# EAGLE board Thermostat (EAGLE 6.3)
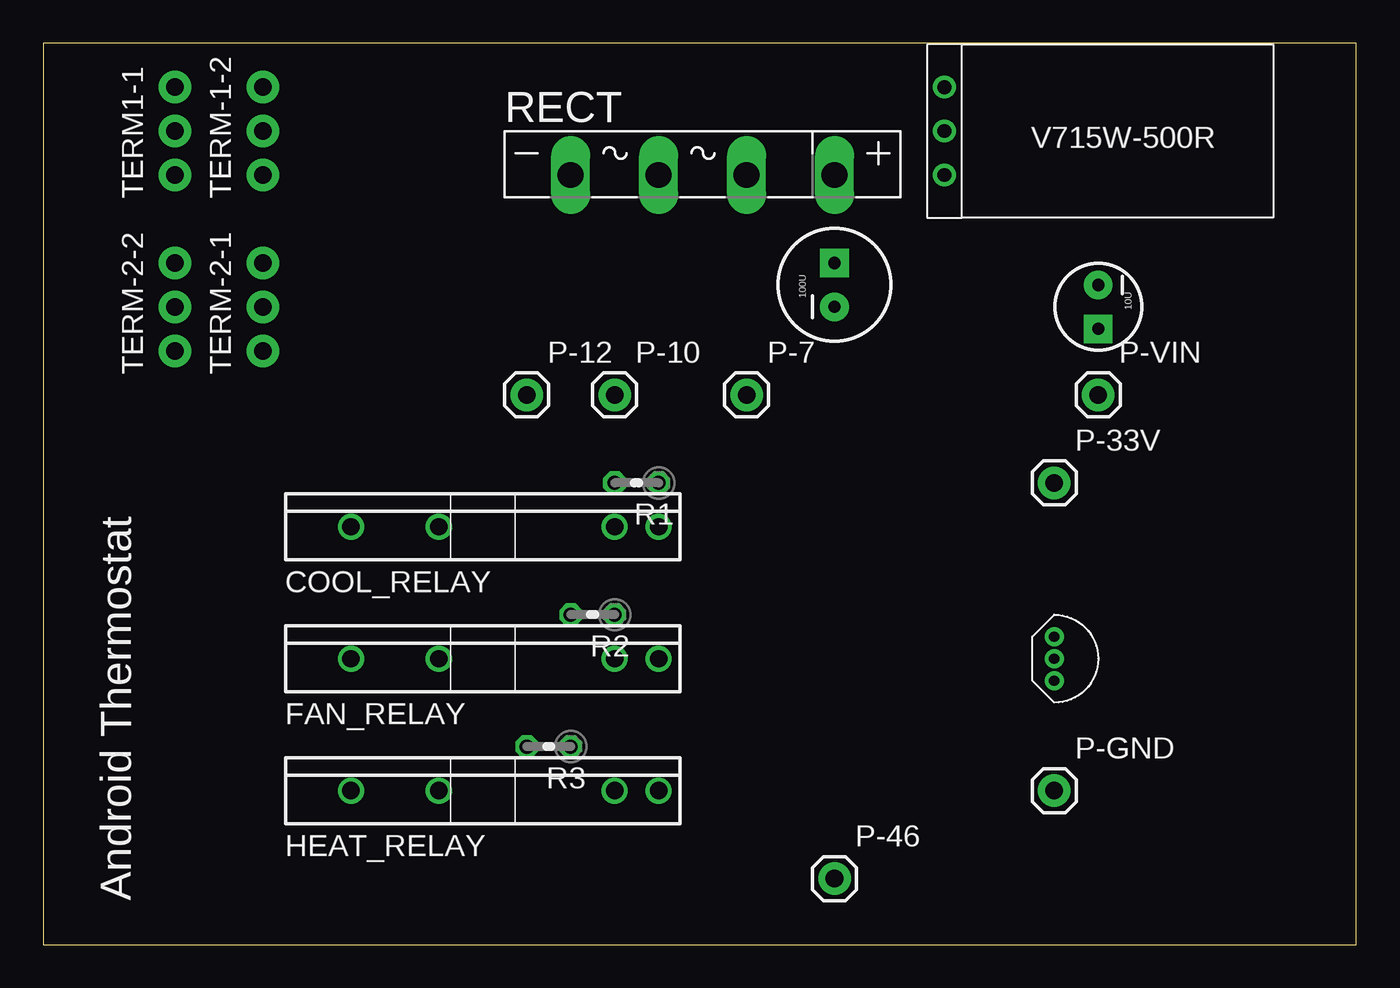
[diagram p0: board, top side]
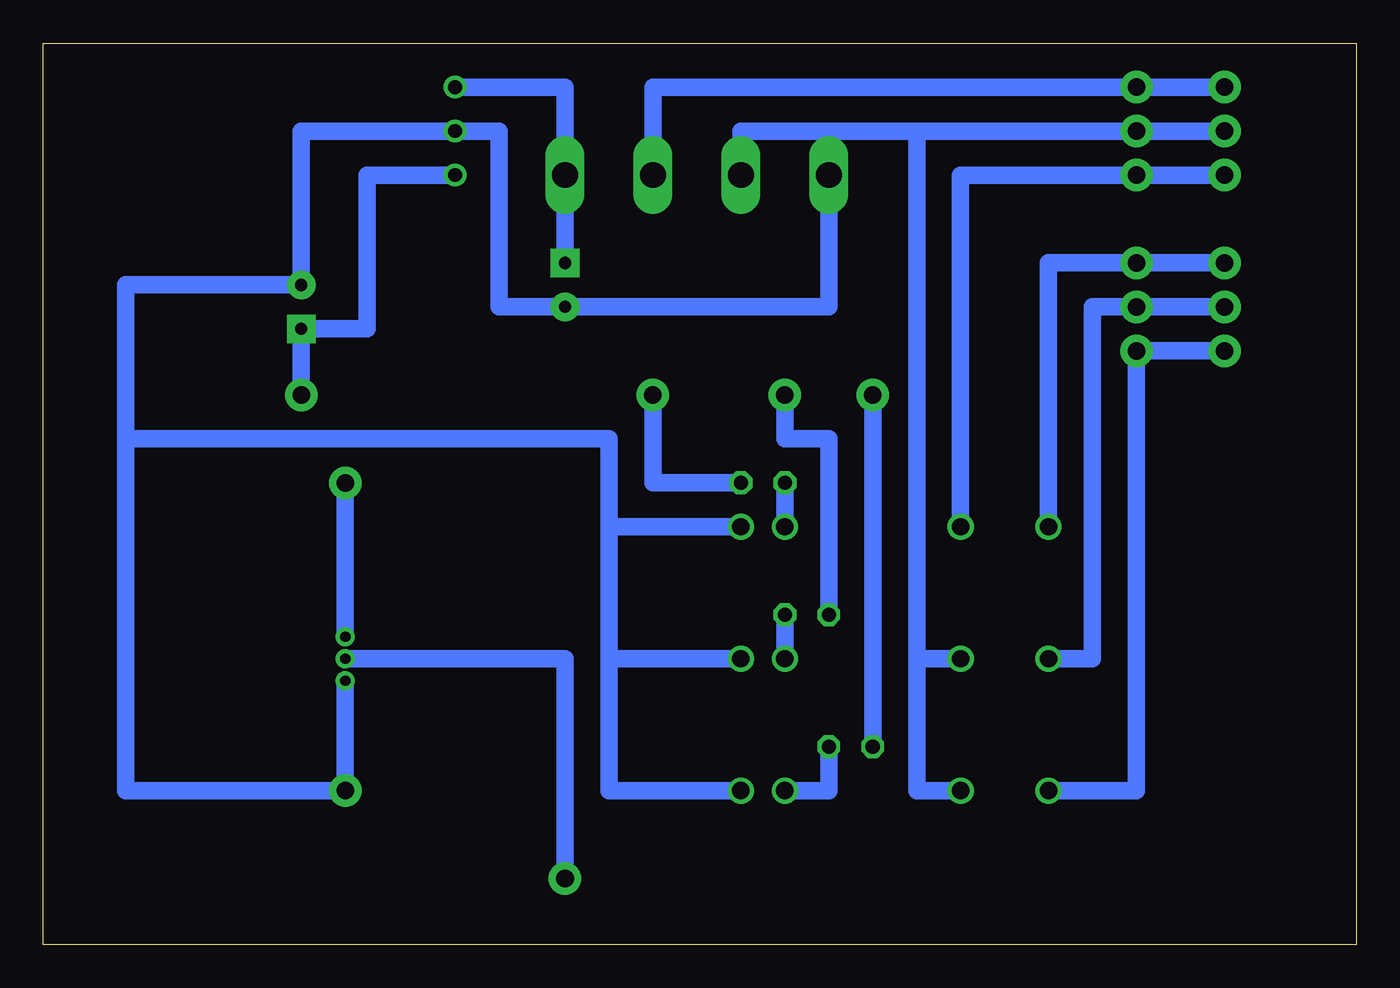
[diagram p1: board, bottom side, seen from below]

Size 75.87 x 52.06 mm. Coordinates in mm from the lower left corner, seen from the top.
Outline: 0,0 75.87,0 75.87,52.06 0,52.06 0,0
Copper layers (1*16): Top 0.035mm / dielectric 1.5mm / Bottom 0.035mm
Design rules "default": minimum track width 50mil, minimum drill 24mil, track to track 15mil, track to pad 15mil, pad to pad 15mil, via to via 15mil, smd to smd 8mil, copper to edge 40mil, drill to drill 20mil, minimum pad ring 10mil, minimum via ring 8mil, stop-mask expansion 4mil, vias tented up to drill 0mil, thermal gap 10mil

## Footprints (pad centres in the part's own frame; a part is rotated, then mirrored left to right if it is on the bottom)
CPOL-RADIAL-10UF-25V = drill 0.7 pad 1.651 square: 1 1.27,0 | drill 0.7 pad 1.651: 2 -1.27,0
CPOL-RADIAL-100UF-25V = drill 0.7 pad 1.651 square: 1 1.27,0 | drill 0.7 pad 1.651: 2 -1.27,0
S102T0X = drill 1: 1 -7.62,0; 2 -2.54,0; 3 7.62,0; 4 10.16,0
1X01 = drill 1.016 pad 1.88: 1 0,0
0204V = drill 0.813 octagon: 1 -1.27,0; 2 1.27,0
GBU4S = drill 1.499 long: + 7.62,0; - -7.62,0; AC1 2.54,0; AC2 -2.54,0
1X03_NO_SILK = drill 1.016 pad 1.88: 1 0,0; 2 2.54,0; 3 5.08,0
TMP36 = drill 0.6 pad 1.016: DATA-2 0,0; GND-3 0,-1.27; VCC-1 0,1.27
SWITCHINGREGULATOR = drill 0.8: GND 0,0; VI 0,2.54; VO 0,-2.54

## Placement (x,y rotation side)
10U  [CPOL-RADIAL-10UF-25V]  60.96,36.83 270 top
100U  [CPOL-RADIAL-100UF-25V]  45.72,38.1 90 top
COOL_RELAY  S101T01  [S102T0X]  25.4,24.13 0 top
FAN_RELAY  S101T01  [S102T0X]  25.4,16.51 0 top
HEAT_RELAY  S101T01  [S102T0X]  25.4,8.89 0 top
P-7  M01PTH  [1X01]  40.64,31.75 0 top
P-10  M01PTH  [1X01]  33.02,31.75 0 top
P-12  M01PTH  [1X01]  27.94,31.75 0 top
P-33V  M01PTH  [1X01]  58.42,26.67 0 top
P-46  M01PTH  [1X01]  45.72,3.81 0 top
P-GND  M01PTH  [1X01]  58.42,8.89 0 top
P-VIN  M01PTH  [1X01]  60.96,31.75 0 top
R1  [0204V]  34.29,26.67 180 top
R2  [0204V]  31.75,19.05 180 top
R3  [0204V]  29.21,11.43 180 top
RECT  [GBU4S]  38.1,44.45 0 top
TERM1-1  [1X03_NO_SILK]  7.62,44.45 90 top
TERM-1-2  [1X03_NO_SILK]  12.7,44.45 90 top
TERM-2-1  [1X03_NO_SILK]  12.7,34.29 90 top
TERM-2-2  [1X03_NO_SILK]  7.62,34.29 90 top
U$1  TMP36  [TMP36]  58.42,16.51 0 top
U$2  V715W-500R  [SWITCHINGREGULATOR]  52.07,46.99 0 top

## Library data of the parts
10U 100U = SparkFun-Passives
COOL_RELAY FAN_RELAY HEAT_RELAY = relay; MPN: AQ2A2-ZP3/28VDC; OC_FARNELL: unknown; OC_NEWARK: unknown
P-7 P-10 P-12 P-33V P-46 P-GND P-VIN TERM1-1 TERM-1-2 TERM-2-1 TERM-2-2 = SparkFun-Connectors
R1-R3 = resistor
RECT = rectifier
U$1 U$2 = android-thermostat

## Nets
GND: 10U.2 100U.2 COOL_RELAY.4 FAN_RELAY.4 HEAT_RELAY.4 P-GND.1 RECT.- U$1.GND-3 U$2.GND
N$1: COOL_RELAY.2 TERM1-1.1 TERM-1-2.1
N$2: HEAT_RELAY.3 R3.1
N$3: RECT.AC1 TERM1-1.3 TERM-1-2.3
N$4: P-7.1 R1.1
N$5: P-46.1 U$1.DATA-2
N$6: FAN_RELAY.3 R2.1
N$7: P-10.1 R2.2
N$8: P-12.1 R3.2
N$9: COOL_RELAY.3 R1.2
N$10: 10U.1 P-VIN.1 U$2.VO
N$11: P-33V.1 U$1.VCC-1
N$12: 100U.1 RECT.+ U$2.VI
N$13: HEAT_RELAY.1 TERM-2-1.1 TERM-2-2.1
N$14: COOL_RELAY.1 TERM-2-1.3 TERM-2-2.3
N$15: FAN_RELAY.1 TERM-2-1.2 TERM-2-2.2
P2: FAN_RELAY.2 HEAT_RELAY.2 RECT.AC2 TERM1-1.2 TERM-1-2.2

## Tracks (layer width: path | path; a pad name or v marks a point on that pad's centre or on a via)
GND
  Bottom 1.016: RECT.- 30.48,36.83 100U.2 49.53,36.83 49.53,46.99 U$2.GND 60.96,46.99 10U.2 71.12,38.1 71.12,29.21 | U$1.GND-3 P-GND.1 71.12,8.89 71.12,29.21 | HEAT_RELAY.4 43.18,8.89 43.18,16.51 | 43.18,16.51 43.18,24.13 | 43.18,24.13 43.18,29.21 71.12,29.21 | FAN_RELAY.4 43.18,16.51 | COOL_RELAY.4 43.18,24.13
N$1
  Bottom 1.016: COOL_RELAY.2 22.86,44.45 TERM-1-2.1 TERM1-1.1
N$2
  Bottom 1.016: HEAT_RELAY.3 30.48,8.89 R3.1
N$3
  Bottom 1.016: TERM1-1.3 TERM-1-2.3 40.64,49.53 RECT.AC1
N$4
  Bottom 1.016: R1.1 40.64,26.67 P-7.1
N$5
  Bottom 1.016: P-46.1 45.72,16.51 U$1.DATA-2
N$6
  Bottom 1.016: FAN_RELAY.3 R2.1
N$7
  Bottom 1.016: R2.2 30.48,29.21 33.02,29.21 P-10.1
N$8
  Bottom 1.016: R3.2 P-12.1
N$9
  Bottom 1.016: COOL_RELAY.3 R1.2
N$10
  Bottom 1.016: U$2.VO 57.15,44.45 57.15,35.56 10U.1 P-VIN.1
N$11
  Bottom 1.016: U$1.VCC-1 P-33V.1
N$12
  Bottom 1.016: 100U.1 RECT.+ 45.72,49.53 U$2.VI
N$13
  Bottom 1.016: HEAT_RELAY.1 12.7,8.89 TERM-2-1.1 TERM-2-2.1
N$14
  Bottom 1.016: COOL_RELAY.1 17.78,39.37 TERM-2-1.3 TERM-2-2.3
N$15
  Bottom 1.016: FAN_RELAY.1 15.24,16.51 15.24,36.83 TERM-2-1.2 TERM-2-2.2
P2
  Bottom 1.016: TERM1-1.2 TERM-1-2.2 25.4,46.99 | 25.4,46.99 35.56,46.99 RECT.AC2 | HEAT_RELAY.2 25.4,8.89 25.4,16.51 | 25.4,16.51 25.4,46.99 | FAN_RELAY.2 25.4,16.51

## Text on the board
tNames: Android Thermostat